# Altium PCB NBP3 Altera MAX7000 MAX3000 PLCC Rev1.00.PcbDoc (part 1 of 2)
Units mm, origin at the board's own origin, x right, y up, seen from the top; angles counter-clockwise.
Board outline 69 x 80.99 mm, 2 copper layers (Top Layer, Bottom Layer); 33 components, 75 nets, 412 pads, 171 vias.
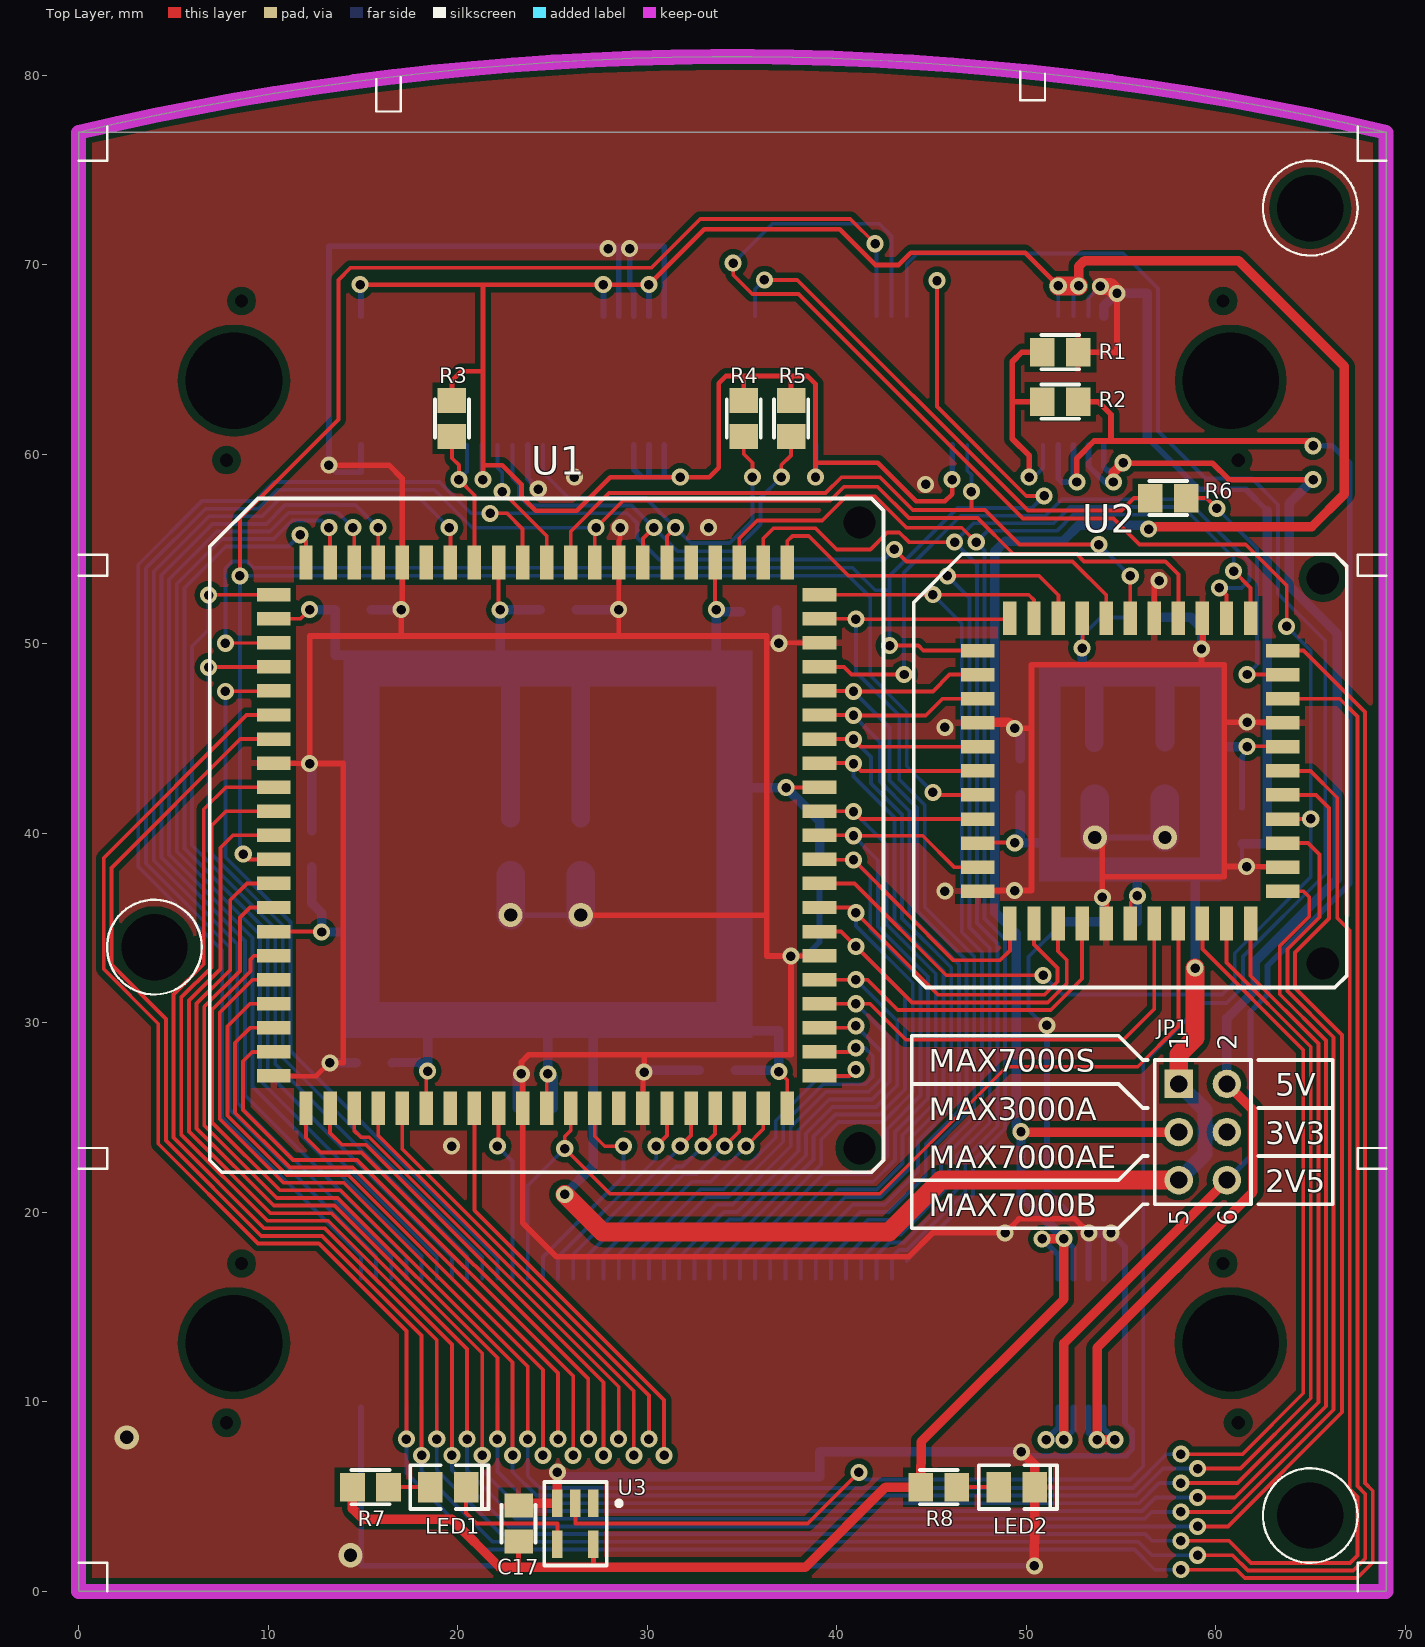
[diagram p0: Top Layer view]
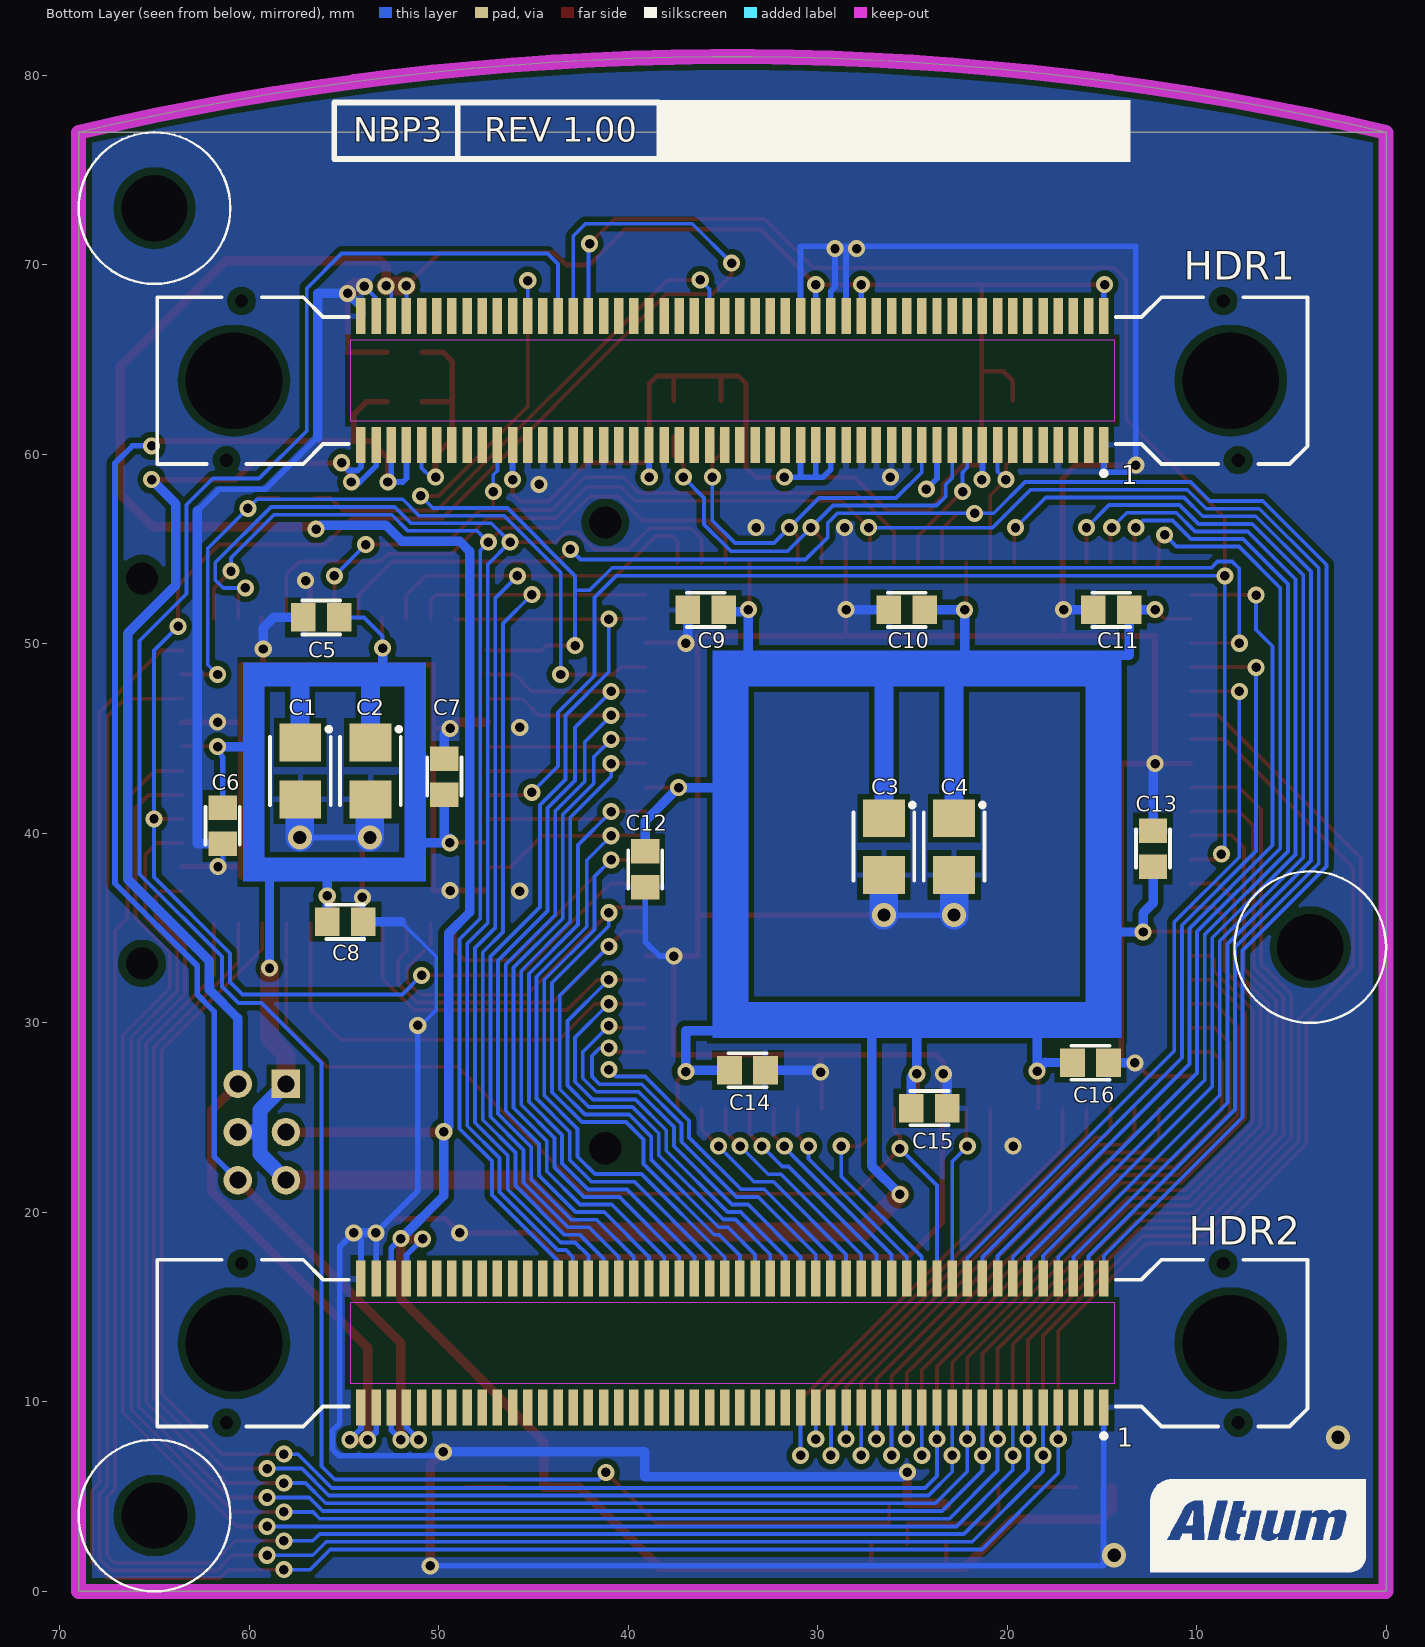
[diagram p1: Bottom Layer view, seen from below]

## Layer stack, top to bottom
Top Layer: signal copper 0.0356
Dielectric: core 0.32, FR-4, Dk 4.8
Bottom Layer: signal copper 0.0356

## Board outline
0,0 0,77 ccw(c0.001,77) 0.001,77 cw(c34.5,-69.801) 0.001,77 69,77 69,0

## Design rules (kind name [scope] priority, off if disabled: settings)
Clearance Clearance_Unplated_Pads [PadIsPlated = 'False'] p1: gap=0.4 // Slightly larger clearance around unplated holes
Clearance Clearance_Polygons [InPolygon] p2: gap=0.3
Clearance [All] p3: gap=0.2
ComponentClearance [All] p1: gap=0.2 collisioncheckmode=3 verticalgap=0.254 showdistances=FALSE
FabricationTestPointUsage TestPointUsage [All] p1 off: valid=0 allowmultiple=FALSE
FabricationTestpoint Testpoint [All] p1 off: side=3 testpointundercomponent=TRUE minsize=1.016 maxsize=2.54 preferedsize=1.524 minholesize=0 maxholesize=1.016 preferedholesize=0.813 testpointgrid=0.025 allowsidetop=TRUE allowsidebottom=TRUE usegrid=TRUE gridtolerance=0
HoleSize [All] p1: absolutevalues=TRUE maxlimit=5.2 minlimit=0.4 maxpercent=80.000 minpercent=20.000
PlaneClearance [All] p1: clearance=0.5
PlaneConnect [All] p1: planeconnectstyle=Relief reliefexpansion=0.5 reliefentries=4 reliefconductorwidth=0.25 reliefairgap=0.25
PolygonConnect PolygonConnect_Satellite_ID_Pads [InPadClass('Satellite ID Pads')] p1: connectstyle=NoConnect reliefconductorwidth=0.254 reliefentries=4 polygonreliefangle="90 Angle"
PolygonConnect [All] p2: connectstyle=Relief reliefconductorwidth=0.3 reliefentries=4 polygonreliefangle="90 Angle"
RoutingVias [All] p1: holewidth=0.5 width=0.9 viastyle="Through Hole" minholewidth=0.5 minwidth=0.9 maxholewidth=0.7 maxwidth=1.27
SMDNeckDown [All] p1: percent=100.000
SilkscreenOverComponentPads [All] p1: minsilkscreentomaskgap=0.254
SolderMaskExpansion SolderMaskExpansion_Vias [Isvia] p1: expansion=-0.65
SolderMaskExpansion [All] p2: expansion=0.1
Width Width_Power_Nets [InNetClass('Power Nets')] p1: maxlimit=2.5 minlimit=0.15 preferedwidth=0.25
Width [All] p2: maxlimit=1.5 minlimit=0.2 preferedwidth=0.2
21 further rules are at their usual default settings.

## Classes and differential pairs
pad class "Satellite ID Pads": HDR1-36 HDR1-38 HDR2-42
net class "Power Nets": 5V GND VCC VCC_FPGA VCCINT

## Components (designator, comment, footprint, x,y, rotation, side; value= is the part's Value field where it differs from the comment)
C1 "10uF" MCCT-B 57.3,43.3 r270 bottom
C2 "10uF" MCCT-B 53.6,43.3 r270 bottom
C3 "10uF" MCCT-B 26.5,39.3 r270 bottom
C4 "10uF" MCCT-B 22.8,39.3 r270 bottom
C5 "0.1uF" CC2012-0805#1 56.2,51.4 r0 bottom
C6 "0.1uF" CC2012-0805#1 61.4,40.4 r270 bottom
C7 "0.1uF" CC2012-0805#1 49.7,43 r90 bottom
C8 "0.1uF" CC2012-0805#1 54.928,35.334 r180 bottom
C9 "0.1uF" CC2012-0805#1 35.9,51.8 r180 bottom
C10 "0.1uF" CC2012-0805#1 25.3,51.8 r180 bottom
C11 "0.1uF" CC2012-0805#1 14.5,51.8 r180 bottom
C12 "0.1uF" CC2012-0805#1 39.1,38.1 r270 bottom
C13 "0.1uF" CC2012-0805#1 12.3,39.2 r270 bottom
C14 "0.1uF" CC2012-0805#1 33.7,27.5 r180 bottom
C15 "0.1uF" CC2012-0805#1 24.1,25.5 r180 bottom
C16 "0.1uF" CC2012-0805#1 15.6,27.9 r180 bottom
C17 "0.1uF" CC2012-0805#2 23.217,3.571 r90 top
HDR1 "54075-1009" 54075 34.5,63.9 r0 bottom locked
HDR2 "54075-1009" 54075 34.5,13.1 r0 bottom locked
JP1 "Header 3X2" HDR2X3 58.06,26.78 r270 top
LED1 "HSMG-C170" "SMD _LED" 19.5,5.5 r180 top locked
LED2 "HSMH-C170" "SMD _LED" 49.5,5.5 r180 top locked
R1 "680R" CC2012-0805#1 51.8,65.4 r0 top
R2 "82R" CC2012-0805#1 51.8,62.787 r180 top
R3 "4K7" CC2012-0805#1 19.7,61.9 r270 top
R4 "4K7" CC2012-0805#1 35.1,61.9 r270 top
R5 "4K7" CC2012-0805#1 37.6,61.9 r270 top
R6 "100R" CC2012-0805#1 57.5,57.7 r0 top
R7 "270R" CC2012-0805#1 15.4,5.5 r0 top
R8 "270R" CC2012-0805#1 45.4,5.5 r0 top
U1 "PLCC84 SM Socket" PLCC84_SKT_SM 24.7,39.9 r0 top
U2 "PLCC44 SM Socket" PLCC44_SKT_SM 55.5,43.3 r0 top
U3 "SN74LVC1G04DBV" SO-G5/P.95 26.217,3.571 r180 top

## Footprints (in the part's own frame and the unit in brackets; to place one, negate y for a bottom-side part, rotate by r counter-clockwise, add the part's x,y. Pads: shape width x height; smd on the part's side, far side on the other; paste and mask are expansions set on the pad)
54075 [mm] "Connector; Docking Station, Receptacle; 100 Position; Vertical"
  rect 0.5x1.9 smd: 1(-19.6,3.4) 2(-19.6,-3.4) 3(-18.8,3.4) 4(-18.8,-3.4) 5(-18,3.4) 6(-18,-3.4) 7(-17.2,3.4) 8(-17.2,-3.4) 9(-16.4,3.4) 10(-16.4,-3.4) 11(-15.6,3.4) 12(-15.6,-3.4) 13(-14.8,3.4) 14(-14.8,-3.4) 15(-14,3.4) 16(-14,-3.4) 17(-13.2,3.4) 18(-13.2,-3.4) 19(-12.4,3.4) 20(-12.4,-3.4) 21(-11.6,3.4) 22(-11.6,-3.4) 23(-10.8,3.4) 24(-10.8,-3.4) 25(-10,3.4) 26(-10,-3.4) 27(-9.2,3.4) 28(-9.2,-3.4) 29(-8.4,3.4) 30(-8.4,-3.4) 31(-7.6,3.4) 32(-7.6,-3.4) 33(-6.8,3.4) 34(-6.8,-3.4) 35(-6,3.4) 36(-6,-3.4) 37(-5.2,3.4) 38(-5.2,-3.4) 39(-4.4,3.4) 40(-4.4,-3.4) 41(-3.6,3.4) 42(-3.6,-3.4) 43(-2.8,3.4) 44(-2.8,-3.4) 45(-2,3.4) 46(-2,-3.4) 47(-1.2,3.4) 48(-1.2,-3.4) 49(-0.4,3.4) 50(-0.4,-3.4) 51(0.4,3.4) 52(0.4,-3.4) 53(1.2,3.4) 54(1.2,-3.4) 55(2,3.4) 56(2,-3.4) 57(2.8,3.4) 58(2.8,-3.4) 59(3.6,3.4) 60(3.6,-3.4) 61(4.4,3.4) 62(4.4,-3.4) 63(5.2,3.4) 64(5.2,-3.4) 65(6,3.4) 66(6,-3.4) 67(6.8,3.4) 68(6.8,-3.4) 69(7.6,3.4) 70(7.6,-3.4) 71(8.4,3.4) 72(8.4,-3.4) 73(9.2,3.4) 74(9.2,-3.4) 75(10,3.4) 76(10,-3.4) 77(10.8,3.4) 78(10.8,-3.4) 79(11.6,3.4) 80(11.6,-3.4) 81(12.4,3.4) 82(12.4,-3.4) 83(13.2,3.4) 84(13.2,-3.4) 85(14,3.4) 86(14,-3.4) 87(14.8,3.4) 88(14.8,-3.4) 89(15.6,3.4) 90(15.6,-3.4) 91(16.4,3.4) 92(16.4,-3.4) 93(17.2,3.4) 94(17.2,-3.4) 95(18,3.4) 96(18,-3.4) 97(18.8,3.4) 98(18.8,-3.4) 99(19.6,3.4) 100(19.6,-3.4)
  round 0.5 hole 0.7 unplated: MH1(-26.7,4.2) MH2(-25.9,-4.2) MH3(26.7,4.2) MH4(25.9,-4.2)
  round 4.8 hole 5.1 unplated: MH5(-26.3,0) MH6(26.3,0)
  Top Layer keep-out region: -20.15,2.15 20.15,2.15 20.15,-2.15 -20.15,-2.15
  silkscreen extent -30.35,-4.4 30.35,5.02
CC2012-0805#1 [mm]
  rect 1.3x1.5 smd: 1(-0.95,0) 2(0.95,0)
  silkscreen extent -1,-0.9 1,0.9
CC2012-0805#2 [mm]
  rect 1.271x1.5 smd: 1(-0.95,0) 2(0.95,0)
  silkscreen extent -1,-0.9 1,0.9
HDR2X3 [mm] "Connector; Header; 3x2 Position"
  rect 1.5x1.5 hole 0.9: 1(0,0)
  round 1.5 hole 0.9: 2(0,2.54) 3(2.54,0) 4(2.54,2.54) 5(5.08,0) 6(5.08,2.54)
  silkscreen extent -1.27,-1.27 6.35,3.81
MCCT-B [mm]
  rect 2x2.2 smd: 1(-1.5,0) 2(1.5,0)
  silkscreen extent -2.3,-1.6 1.8,1.6
PLCC44_SKT_SM [mm] "Socket, PLCC44, surface mount"
  rect 0.71x1.78 smd: 1(0,8.05) 2(-1.27,8.05) 3(-2.54,8.05) 4(-3.81,8.05) 5(-5.08,8.05) 6(-6.35,8.05) 18(-6.35,-8.05) 19(-5.08,-8.05) 20(-3.81,-8.05) 21(-2.54,-8.05) 22(-1.27,-8.05) 23(0,-8.05) 24(1.27,-8.05) 25(2.54,-8.05) 26(3.81,-8.05) 27(5.08,-8.05) 28(6.35,-8.05) 40(6.35,8.05) 41(5.08,8.05) 42(3.81,8.05) 43(2.54,8.05) 44(1.27,8.05)
  rect 1.78x0.71 smd: 7(-8.05,6.35) 8(-8.05,5.08) 9(-8.05,3.81) 10(-8.05,2.54) 11(-8.05,1.27) 12(-8.05,0) 13(-8.05,-1.27) 14(-8.05,-2.54) 15(-8.05,-3.81) 16(-8.05,-5.08) 17(-8.05,-6.35) 29(8.05,-6.35) 30(8.05,-5.08) 31(8.05,-3.81) 32(8.05,-2.54) 33(8.05,-1.27) 34(8.05,0) 35(8.05,1.27) 36(8.05,2.54) 37(8.05,3.81) 38(8.05,5.08) 39(8.05,6.35)
  round 1.4 hole 1.7 unplated: M1(10.16,10.16) M2(10.16,-10.16)
  silkscreen extent -11.43,-11.43 11.43,11.43
PLCC84_SKT_SM [mm] "Socket, PLCC84, surface mount"
  rect 0.71x1.78 smd: 1(0,14.4) 2(-1.27,14.4) 3(-2.54,14.4) 4(-3.81,14.4) 5(-5.08,14.4) 6(-6.35,14.4) 7(-7.62,14.4) 8(-8.89,14.4) 9(-10.16,14.4) 10(-11.43,14.4) 11(-12.7,14.4) 33(-12.7,-14.4) 34(-11.43,-14.4) 35(-10.16,-14.4) 36(-8.89,-14.4) 37(-7.62,-14.4) 38(-6.35,-14.4) 39(-5.08,-14.4) 40(-3.81,-14.4) 41(-2.54,-14.4) 42(-1.27,-14.4) 43(0,-14.4) 44(1.27,-14.4) 45(2.54,-14.4) 46(3.81,-14.4) 47(5.08,-14.4) 48(6.35,-14.4) 49(7.62,-14.4) 50(8.89,-14.4) 51(10.16,-14.4) 52(11.43,-14.4) 53(12.7,-14.4) 75(12.7,14.4) 76(11.43,14.4) 77(10.16,14.4) 78(8.89,14.4) 79(7.62,14.4) 80(6.35,14.4) 81(5.08,14.4) 82(3.81,14.4) 83(2.54,14.4) 84(1.27,14.4)
  rect 1.78x0.71 smd: 12(-14.4,12.7) 13(-14.4,11.43) 14(-14.4,10.16) 15(-14.4,8.89) 16(-14.4,7.62) 17(-14.4,6.35) 18(-14.4,5.08) 19(-14.4,3.81) 20(-14.4,2.54) 21(-14.4,1.27) 22(-14.4,0) 23(-14.4,-1.27) 24(-14.4,-2.54) 25(-14.4,-3.81) 26(-14.4,-5.08) 27(-14.4,-6.35) 28(-14.4,-7.62) 29(-14.4,-8.89) 30(-14.4,-10.16) 31(-14.4,-11.43) 32(-14.4,-12.7) 54(14.4,-12.7) 55(14.4,-11.43) 56(14.4,-10.16) 57(14.4,-8.89) 58(14.4,-7.62) 59(14.4,-6.35) 60(14.4,-5.08) 61(14.4,-3.81) 62(14.4,-2.54) 63(14.4,-1.27) 64(14.4,0) 65(14.4,1.27) 66(14.4,2.54) 67(14.4,3.81) 68(14.4,5.08) 69(14.4,6.35) 70(14.4,7.62) 71(14.4,8.89) 72(14.4,10.16) 73(14.4,11.43) 74(14.4,12.7)
  round 1.4 hole 1.7 unplated: M1(16.51,16.51) M2(16.51,-16.51)
  silkscreen extent -17.78,-17.78 17.78,17.78
"SMD _LED" [mm]
  rect 1.3x1.6 smd: 1(0.95,0) 2(-0.95,0)
  silkscreen extent -2.13,-1.15 2,1.15
SO-G5/P.95 [mm]
  rect 0.55x1.45 smd: 1(-0.95,-1.075) 2(0,-1.075) 3(0.95,-1.075) 4(0.95,1.075) 5(-0.95,1.075)
  silkscreen extent -2.43,-2.2 1.65,2.2

## Part data
C1 C2 C3 C4: library part CAP_POLAR, "Polar Capacitor"
C5 C6 C7 C8 C9 C10 C11 C12 C13 C14 C15 C16 C17: library part CAP, "Capacitor"
HDR1 HDR2: "Board-to-Board, Docking Station, 0.80mm (.031\") Pitch, Shielded Receptacle, Vertical, Ultra Low Profile, SMT"
JP1: "Header, 3-Pin, Dual row"
LED1 LED2: library part HSMX-C670, "Typical RED GaAs SMD LED Agilent make"
R1 R2 R3 R4 R5 R6 R7 R8: library part RES, "Resistor"
U1: library part EPM7160SLC84-10, "MAX 7000S 5V In-System Programmable CPLD, 160 Macrocells, 84-Pin PLCC, Speed Grade 10, Commercial Grade"
U2: library part EPM3032ALC44-10, "MAX 3032, 44-Pin PLCC, Speed Grade 10, Commercial Grade"
U3: library part SN74AHC1G04DBVR

## Free pads (board coordinates)
  round 3.2 hole 3.5 unplated: LP(4,34) LP(65,4) LP(65,73)

## Via types
v1: diameter 0.9, hole 0.5, Top Layer to Bottom Layer, 165 vias
v2: diameter 1.27, hole 0.7, Top Layer to Bottom Layer, 6 vias

## Nets (pads, with @x,y where several pads share a name; then routed paths per layer and width w, separated by ;. In a path a pad name is that pad's centre, name@x,y a point inside that pad or via, vN(x,y) a via of type N, cw(c..) or ccw(c..) an arc to the next point about the centre after c; other vN are vias at no path point)
5V: HDR1.97 HDR1.99 HDR2.97 HDR2.99 JP1.2 | length 84.1
  Top Layer w0.3: v1(55.118,59.563) 55.601,59.538 59.842,59.538 60.706,58.674 v1(65.151,58.674)
  Top Layer w0.5: v1(54.61,58.547) 54.61,59.055 v1(55.118,59.563) ; v1(54.686,8.001) v1(53.746,8.001) 53.746,12.852 61.976,21.082 61.976,25.404 JP1.2@60.6,26.78
  Bottom Layer w0.3: HDR1.97@53.3,60.5 53.3,59.4 54.178,58.522 v1(54.61,58.547) ; HDR1.99@54.1,60.5 54.1,59.336 54.28,59.157 54.762,59.157 v1(55.118,59.563) ; 54.1,8.587 HDR2.99@54.1,9.7 54.1,8.587 ; 54.1,8.587 v1(54.686,8.001) 54.1,8.587 ; 53.3,8.371 v1(53.746,8.001) 53.3,8.447 HDR2.97@53.3,9.7 53.3,8.371
  Bottom Layer w0.5: JP1.2@60.6,26.78 60.6,30.247 62.103,31.75 62.103,33.274 66.421,37.592 66.421,50.546 63.881,53.086 63.881,57.404 v1(65.151,58.674)
BOC_RX: HDR1.19 U1.1 | length 7.3
  Top Layer w0.2: v1(22.352,58.039) 24.7,55.691 U1.1@24.7,54.3
  Bottom Layer w0.2: HDR1.19@22.1,60.5 22.1,59.307 22.352,59.055 v1(22.352,58.039)
BOC_TX: HDR1.15 R3.2 U1.4 | length 9.1
  Top Layer w0.2: R3.2@19.7,60.95 19.7,59.802 20.066,59.436 v1(20.066,58.674) 20.89,57.85 U1.4@20.89,54.3
  Bottom Layer w0.2: v1(20.066,58.674) 20.5,59.108 HDR1.15@20.5,60.5
BUZZER: HDR2.24 U1.44 U2.25 | length 52.4
  Top Layer w0.2: U1.44@25.97,25.5 25.97,24.319 25.654,24.003 v1(25.654,23.368) 28.034,20.988 42.282,20.988 48.98,27.686 55.895,27.686 58.04,29.831 U2.25@58.04,35.25
  Bottom Layer w0.2: HDR2.24@23.7,16.5 23.7,21.414 v1(25.654,23.368)
FPGA_CLK: HDR2.2 U1.2 U2.2 | length 103.8
  Top Layer w0.2: v1(21.717,56.896) 22.606,56.896 23.43,56.072 U1.2@23.43,54.3 ; v1(43.053,54.991) 43.688,54.356 52.451,54.356 54.23,52.577 U2.2@54.23,51.35
  Bottom Layer w0.2: HDR2.2@14.9,16.5 14.9,17.7 7.575,25.025 7.575,33.827 3.15,38.252 3.15,54.178 6.508,57.537 9.302,57.537 10.312,58.547 19.05,58.547 20.701,56.896 28.956,56.896 29.464,56.388 29.464,55.626 30.632,54.458 42.52,54.458 v1(43.053,54.991)
FPGA_DONE: HDR1.74 U3.2 | length 121.5
  Top Layer w0.2: U3.2@26.217,4.646 26.217,3.581 38.481,3.581 v1(41.173,6.274)
  Bottom Layer w0.2: v1(41.173,6.274) 41.542,5.905 55.486,5.905 56.185,6.604 56.185,27.889 59.345,31.05 60.572,31.05 61.443,31.921 61.443,33.503 65.786,37.846 65.786,50.165 63.304,52.647 63.304,57.346 61.923,58.727 59.476,58.727 56.963,61.239 56.963,68.767 55.126,70.604 44.255,70.604 43.7,70.049 HDR1.74@43.7,67.3
FPGA_TCK: HDR1.72 U1.62 U2.32 | length 99.5
  Top Layer w0.2: v1(34.544,70.104) 34.544,69.469 35.55,68.463 37.986,68.463 49.832,56.617 54.61,56.617 55.982,55.245 61.595,55.245 63.754,53.086 v1(63.754,50.927) ; U1.62@39.1,37.36 40.945,37.36 45.793,32.512 v1(50.902,32.512) ; U2.32@63.55,40.763 v1(65.024,40.767)
  Bottom Layer w0.2: v1(34.544,70.104) 36.614,72.174 42.253,72.174 42.9,71.527 HDR1.72@42.9,67.3 ; v1(50.902,32.512) 51.91,31.504 60.358,31.504 61.011,32.156 61.011,33.68 65.024,37.694 65.024,49.657 v1(63.754,50.927)
FPGA_TDI: HDR1.78 U1.14 U2.7 | length 76.8
  Top Layer w0.2: v1(7.747,50.038) U1.14@10.3,50.06 ; v1(42.799,49.911) 44.316,49.911 44.577,49.65 U2.7@47.45,49.65 ; v1(45.3,69.176) 45.3,62.523 50.013,57.81 v1(50.952,57.81) ; U2.7@47.45,49.684 U2.7@47.478,49.684
  Bottom Layer w0.2: v1(7.747,50.038) 7.747,53.975 8.128,54.356 8.89,54.356 9.22,54.026 40.843,54.026 42.037,52.832 42.799,52.832 ; v1(42.799,49.911) 42.799,53.594 46.374,57.169 50.311,57.169 v1(50.952,57.81) ; HDR1.78@45.3,67.3 v1(45.3,69.176)
FPGA_TDO: HDR1.54 R6.1 | length 27.8
  Top Layer w0.2: v1(36.195,69.215) 37.926,69.215 50.104,57.038 55.042,57.038 55.704,57.7 R6.1@56.55,57.7
  Bottom Layer w0.2: HDR1.54@35.7,67.3 35.7,68.72 v1(36.195,69.215)
FPGA_TDO#: R6.2 U1.71 U2.38 | length 41.9
  Top Layer w0.2: U1.71@39.1,48.79 40.386,48.79 40.789,48.387 v1(43.561,48.387) ; R6.2@58.45,57.7 59.521,57.7 v1(60.071,57.15) ; v1(61.671,48.387) 61.983,48.38 U2.38@63.55,48.38 ; U2.38@63.549,48.414 U2.38@63.578,48.414
  Bottom Layer w0.2: v1(43.561,48.387) 43.561,53.772 46.558,56.769 51.035,56.769 51.899,57.633 59.588,57.633 62.188,55.033 62.188,48.904 v1(61.671,48.387)
FPGA_TMS: HDR1.70 U1.23 U2.13 | length 116.1
  Top Layer w0.2: v1(8.509,53.594) 8.509,56.642 13.716,61.849 13.716,69.215 14.351,69.85 30.226,69.85 32.809,72.433 40.724,72.433 v1(42.037,71.12) ; v1(8.687,38.913) 8.97,38.63 U1.23@10.3,38.63 ; v1(45.085,42.164) 45.473,42.03 U2.13@47.45,42.03
  Bottom Layer w0.2: v1(8.687,38.913) 8.509,39.091 v1(8.509,53.594) 40.64,53.594 41.783,52.451 41.783,48.318 43.707,46.394 43.707,43.542 v1(45.085,42.164) v1@45.085,42.167 ; v1(42.037,71.12) 42.1,71.057 HDR1.70@42.1,67.3
GND: C1.2 C2.2 C3.2 C4.2 C5.2 C6.2 C7.2 C8.2 C9.1 C10.1 C11.1 C12.2 C13.1 C14.2 C15.2 C16.2 C17.2 HDR1.1 HDR1.7 HDR1.23 HDR1.27 HDR1.29 HDR1.31 HDR1.33 HDR1.35 HDR1.36 HDR1.38 HDR1.42 HDR1.59 HDR1.63 HDR1.65 HDR1.67 HDR1.69 HDR1.71 HDR1.73 HDR1.75 HDR1.77 HDR1.98 HDR1.100 HDR2.1 HDR2.98 HDR2.100 LED2.2 R1.2 U1.7 U1.19 U1.32 U1.42 U1.47 U1.59 U1.72 U1.82 U2.10 U2.17 U2.22 U2.30 U2.36 U2.42 U2.44 U3.3 | length 489.5
  Top Layer w0.25: U1.32@10.3,27.2 10.322,27.178 12.55,27.203 v1(13.259,27.889) ; U1.19@10.3,43.71 10.322,43.688 v1(12.192,43.688) ; U1.42@23.43,25.5 23.43,26.649 ; 28.51,50.419 28.51,55.434 28.575,55.499 v1(28.575,56.134) ; U1.47@29.78,25.5 v1@29.78,27.335 ; 36.322,50.038 v1(36.957,50.038) ; v1@36.979,50.06 U1.72@39.1,50.06 ; v1(37.592,33.528) 39.078,33.528 U1.59@39.1,33.55 ; v1(54.026,36.627) 54.258,36.395 U2.22@54.258,35.284 ; v1(61.646,38.252) 63.55,38.254 U2.30@63.578,38.254
  Top Layer w0.3: v1(13.208,59.436) 16.383,59.436 17.08,58.739 U1.7@17.08,54.3 17.08,51.878 v1(17.018,51.816) 17.018,50.419 ; v1(13.259,27.889) 13.97,27.889 13.97,43.688 v1(12.192,43.688) 12.192,50.419 17.018,50.419 ; v2(26.5,35.689) 36.322,35.689 ; v1(29.845,27.4) 29.845,28.321 ; U2.17@47.478,36.984 50.292,36.984 50.292,48.895 60.452,48.895 60.452,37.719 54.026,37.719 ; v1(49.4,45.545) 50.292,45.545 ; R1.2@52.75,65.4 54.8,65.4 v1(54.8,68.5) ; v1(53.315,18.923) 52.578,19.66 49.632,19.66 v1(48.895,18.923) 45.072,18.923 43.802,17.653 25.233,17.653 23.43,19.456 U1.42@23.43,25.5 23.43,27.243 v1(23.368,27.305) 23.368,27.94 23.749,28.321 29.845,28.321 ; v2(53.628,39.785) 54.026,39.785 v1(54.026,36.627) ; U2.44@56.77,51.35 56.77,53.087 v1(57.023,53.34) ; 59.259,48.895 v1(59.259,49.734) 59.338,49.813 U2.42@59.338,51.384 ; 60.452,38.252 v1(61.646,38.252) ; 60.452,45.872 v1(61.671,45.872) 63.55,45.874 U2.36@63.578,45.874 ; 17.018,50.419 36.322,50.419 36.322,50.038 36.322,33.528 v1(37.592,33.528) 37.592,28.321 29.845,28.321
  Top Layer w0.5: C17.2@23.217,4.521 23.342,4.646 U3.3@25.267,4.646 v1(25.267,6.294) ; U2.10@47.478,45.874 49.071,45.874 v1(49.4,45.545) ; v1(49.759,7.366) 50.45,6.675 50.45,3.652 v1(50.444,1.346)
  Top Layer w0.9: v1(53.925,68.875) 54.425,68.875 v1(54.8,68.5)
  Bottom Layer w0.2: v1(51.105,29.87) 50.942,29.87 50.129,30.683 50.129,33.492 51.971,35.334 ; HDR1.98@53.3,67.3 53.3,68.25 v1(53.925,68.875) ; C6.2@61.4,39.45 61.4,38.498 v1(61.646,38.252)
  Bottom Layer w0.25: C8.2@53.978,35.334 v1(54.026,36.627)
  Bottom Layer w0.3: HDR2.1@14.9,9.7 14.91,1.346 v1(50.444,1.346) ; HDR1.1@14.9,60.5 14.9,59.055 13.589,59.055 v1(13.208,59.436) 13.208,70.993 30.9,70.993 HDR1.42@30.9,67.3 ; v2(22.8,35.689) v2(26.5,35.689) ; HDR1.23@23.7,60.5 23.7,58.723 v1(24.257,58.166) ; HDR1.36@28.5,67.3 28.5,70.993 ; v1@29.083,70.993 29.083,68.834 29.3,68.617 HDR1.38@29.3,67.3 ; v1(37.592,33.528) 38.354,33.528 39.1,34.274 C12.2@39.1,37.15 ; v1(49.759,7.366) 49.962,7.163 55.27,7.163 55.6,7.492 55.6,8.484 55.22,8.865 55.22,18.186 v1(54.483,18.923) 54.1,18.54 HDR2.100@54.1,16.5 ; v1(51.105,29.87) 51.105,21.133 v1(53.315,18.923) 53.3,18.908 HDR2.98@53.3,16.5 ; v2(53.628,39.785) v2(57.328,39.785) ; 56.388,60.909 59.131,58.166 61.595,58.166 62.738,57.023
  Bottom Layer w0.5: v1(12.192,43.688) 12.3,43.58 C13.1@12.3,40.15 ; v1(13.259,27.889) C16.2@14.65,27.9 ; C11.1@15.45,51.8 v1@17.002,51.8 ; C15.2@23.15,25.5 v1@23.15,27.015 ; v1(25.267,6.294) 25.506,6.055 39.116,6.055 39.116,7.366 v1(49.759,7.366) ; C10.1@26.25,51.8 v1@28.5,51.8 ; v1(29.845,27.4) 29.945,27.5 C14.2@32.75,27.5 ; C9.1@36.85,51.8 36.85,50.145 v1(36.957,50.038) ; v1(49.4,45.545) 49.7,45.245 C7.2@49.7,43.95 ; 51.971,35.334 C8.2@53.978,35.334 ; v1(53.315,18.923) v1(54.483,18.923) ; HDR1.100@54.1,67.3 54.1,67.825 v1(54.8,68.5) 56.388,68.5 56.388,60.909 ; C5.2@57.15,51.4 58.709,51.4 59.259,50.85 v1(59.259,49.734) ; C6.2@61.4,39.45 62.738,39.45 62.738,57.023
  Bottom Layer w1.5: v2(22.8,35.689) C4.2@22.8,37.8 ; v2(26.5,35.689) C3.2@26.5,37.8 ; v2(53.628,39.785) C2.2@53.628,41.834 ; v2(57.328,39.785) C1.2@57.328,41.834
  other v1: 19.685,23.495 45.72,36.957 49.396,36.984 45.72,45.593 28.499,51.816 33.25,56.134 44.704,58.42 26.162,58.8 27.94,70.866 29.083,70.866
  other v2: 14.351,1.905 2.54,8.128
IO0: HDR2.7 U1.17 U2.39 | length 159.1
  Top Layer w0.2: U1.17@10.3,46.25 8.865,46.25 1.321,38.706 1.321,32.842 4.204,29.959 4.204,23.622 9.468,18.358 12.677,18.358 17.3,13.735 v1(17.3,8.029) ; v1(58.166,1.143) 61.099,1.143 61.542,0.7 67.477,0.7 68.3,1.523 68.3,5.31 67.894,5.716 67.894,46.406 64.65,49.65 U2.39@63.55,49.65
  Bottom Layer w0.2: HDR2.7@17.3,9.7 17.3,6.246 21.33,2.216 55.721,2.216 56.794,1.143 v1(58.166,1.143)
IO1: HDR2.9 U1.18 U2.37 | length 155.6
  Top Layer w0.2: U1.18@10.3,44.98 8.531,44.98 1.727,38.176 1.727,33.09 4.604,30.213 4.604,23.788 9.633,18.758 12.842,18.758 18.1,13.5 v1(18.1,7.173) ; v1(59.055,1.905) 60.902,1.905 61.707,1.1 67.267,1.1 67.9,1.733 67.9,5.144 67.488,5.556 67.488,46.177 66.555,47.11 U2.37@63.55,47.11
  Bottom Layer w0.2: HDR2.9@18.1,9.7 18.1,6.36 21.844,2.616 55.931,2.616 56.642,1.905 v1(59.055,1.905)
IO2: HDR2.11 U1.20 U2.34 | length 143.7
  Top Layer w0.2: U1.20@10.3,42.44 7.769,42.44 6.604,41.275 6.604,33.095 5.004,31.495 5.004,23.953 9.799,19.158 13.008,19.158 18.9,13.266 v1(18.9,8.029) ; v1(58.166,2.667) 60.706,2.667 61.873,1.5 67.101,1.5 67.5,1.899 67.5,4.978 67.081,5.397 67.081,34.874 66.421,35.535 66.421,41.885 65.006,43.3 U2.34@63.55,43.3
  Bottom Layer w0.2: HDR2.11@18.9,9.7 18.9,6.412 22.283,3.029 56.28,3.029 56.642,2.667 v1(58.166,2.667)
IO3: HDR2.13 U1.21 U2.33 | length 135.7
  Top Layer w0.2: U1.21@10.3,41.17 7.769,41.17 7.004,40.405 7.004,32.93 5.41,31.336 5.41,24.113 9.965,19.558 13.174,19.558 19.7,13.032 v1(19.7,7.173) ; v1(59.055,3.429) 60.655,3.429 66.675,9.449 66.675,29.359 64.192,31.842 64.192,33.712 65.996,35.516 65.996,41.345 65.31,42.03 U2.33@63.55,42.03
  Bottom Layer w0.2: HDR2.13@19.7,9.7 19.7,6.401 22.672,3.429 v1(59.055,3.429)
IO4: HDR2.15 U1.22 U2.31 | length 128.6
  Top Layer w0.2: U1.22@10.3,39.9 8.15,39.9 7.493,39.243 7.493,32.853 5.817,31.177 5.817,24.272 10.131,19.958 13.339,19.958 20.5,12.797 v1(20.5,8.029) ; v1(58.166,4.191) 60.833,4.191 66.229,9.587 66.229,29.24 63.792,31.676 63.792,33.889 65.481,35.578 65.481,38.888 64.879,39.49 U2.31@63.55,39.49
  Bottom Layer w0.2: HDR2.15@20.5,9.7 20.5,6.375 23.04,3.835 56.277,3.835 56.632,4.191 v1(58.166,4.191)
IO5: HDR2.17 U1.24 U2.29 | length 121.9
  Top Layer w0.2: U1.24@10.3,37.36 8.88,37.36 8.001,36.481 8.001,32.795 6.223,31.017 6.223,24.431 10.296,20.358 13.505,20.358 21.3,12.563 v1(21.3,7.173) ; v1(59.055,4.953) 61.011,4.953 65.829,9.771 65.829,29.074 63.392,31.511 63.392,34.055 64.948,35.611 64.948,36.652 64.65,36.95 U2.29@63.55,36.95
  Bottom Layer w0.2: HDR2.17@21.3,9.7 21.3,6.375 23.434,4.242 56.118,4.242 56.829,4.953 v1(59.055,4.953)
IO6: HDR2.19 U1.25 U2.28 | length 115
  Top Layer w0.2: U1.25@10.3,36.09 9.039,36.09 8.509,35.56 8.509,32.738 6.629,30.858 6.629,24.591 10.453,20.767 13.662,20.767 22.1,12.329 v1(22.1,8.029) ; v1(58.166,5.715) 61.163,5.715 65.429,9.981 65.429,28.908 61.85,32.487 U2.28@61.85,35.25
  Bottom Layer w0.2: HDR2.19@22.1,9.7 22.1,6.325 23.776,4.648 55.958,4.648 57.025,5.715 v1(58.166,5.715)
IO7: HDR2.21 U1.27 U2.27 | length 111.9
  Top Layer w0.2: U1.27@10.3,33.55 9.268,33.55 9.068,33.35 9.068,32.731 7.036,30.699 7.036,24.75 10.619,21.167 13.827,21.167 22.9,12.094 v1(22.9,7.173) ; v1(59.055,6.477) 61.316,6.477 65.029,10.19 65.029,28.743 60.58,33.191 U2.27@60.58,35.25
  Bottom Layer w0.2: HDR2.21@22.9,9.7 22.9,6.31 24.155,5.055 55.799,5.055 57.221,6.477 v1(59.055,6.477)
IO8: HDR2.23 U1.28 U2.26 | length 108.5
  Top Layer w0.2: U1.28@10.3,32.28 9.183,32.28 7.442,30.54 7.442,24.943 10.818,21.567 13.993,21.567 23.7,11.86 v1(23.7,8.029) ; v1(58.166,7.239) 61.417,7.239 64.629,10.451 64.629,28.577 59.31,33.896 U2.26@59.31,35.25
  Bottom Layer w0.2: HDR2.23@23.7,9.7 23.7,6.096 24.335,5.461 55.64,5.461 57.418,7.239 v1(58.166,7.239)
IO9: HDR2.25 U1.29 | length 36.9
  Top Layer w0.2: U1.29@10.3,31.01 9.039,31.01 7.849,29.82 7.849,25.102 10.984,21.967 14.228,21.967 24.5,11.695 v1(24.5,7.173)
  Bottom Layer w0.2: v1(24.5,7.173) HDR2.25@24.5,9.7
IO10: HDR2.27 U1.30 | length 34
  Top Layer w0.2: U1.30@10.3,29.74 9.039,29.74 8.255,28.956 8.255,25.261 11.149,22.367 14.463,22.367 25.3,11.53 v1(25.3,8.029)
  Bottom Layer w0.2: v1(25.3,8.029) HDR2.27@25.3,9.7
IO11: HDR2.29 U1.31 | length 34.4
  Top Layer w0.2: U1.31@10.3,28.47 9.166,28.47 8.673,27.977 8.673,25.409 11.315,22.767 14.698,22.767 26.1,11.365 v1(26.1,7.173)
  Bottom Layer w0.2: v1(26.1,7.173) HDR2.29@26.1,9.7
IO12: HDR2.31 U1.33 | length 26.6
  Top Layer w0.2: U1.33@12,25.5 12,23.941 12.774,23.167 14.933,23.167 26.9,11.2 v1(26.9,8.029)
  Bottom Layer w0.2: v1(26.9,8.029) HDR2.31@26.9,9.7
IO13: HDR2.33 U1.34 | length 27.6
  Top Layer w0.2: U1.34@13.27,25.5 13.27,24.195 13.898,23.567 15.168,23.567 27.7,11.035 v1(27.7,7.173)
  Bottom Layer w0.2: v1(27.7,7.173) HDR2.33@27.7,9.7
IO14: HDR2.35 U1.35 | length 25.2
  Top Layer w0.2: U1.35@14.54,25.5 14.54,24.322 14.895,23.967 15.334,23.967 28.5,10.801 v1(28.5,8.029)
  Bottom Layer w0.2: v1(28.5,8.029) HDR2.35@28.5,9.7
IO15: HDR2.37 U1.36 | length 26.4
  Top Layer w0.2: U1.36@15.81,25.5 15.81,24.056 29.3,10.566 v1(29.3,7.173)
  Bottom Layer w0.2: v1(29.3,7.173) HDR2.37@29.3,9.7
IO16: HDR2.39 U1.37 | length 24.5
  Top Layer w0.2: U1.37@17.08,25.5 17.08,23.352 30.1,10.332 v1(30.1,8.029)
  Bottom Layer w0.2: v1(30.1,8.029) HDR2.39@30.1,9.7
IO17: HDR2.41 U1.40 | length 25
  Top Layer w0.2: U1.40@20.89,25.5 20.89,20.108 30.9,10.098 v1(30.9,7.173)
  Bottom Layer w0.2: v1(30.9,7.173) HDR2.41@30.9,9.7
LCD_BCKL: HDR2.22 U1.41 | length 9.4
  Top Layer w0.2: v1(22.098,23.495) 22.16,23.557 U1.41@22.16,25.5
  Bottom Layer w0.2: v1(22.098,23.495) 22.9,22.693 HDR2.22@22.9,16.5
LCD_E: HDR2.26 U1.45 | length 12
  Top Layer w0.2: U1.45@27.24,25.5 27.24,24.017 27.762,23.495 v1(28.753,23.495)
  Bottom Layer w0.2: HDR2.26@24.5,16.5 24.5,17.642 28.753,21.895 v1(28.753,23.495)
LED0: HDR2.60 U1.68 U2.11 | length 43.4
  Top Layer w0.2: U1.68@39.1,44.98 40.872,44.98 41.282,44.57 U2.11@47.45,44.57
  Bottom Layer w0.2: HDR2.60@38.1,16.5 38.1,17.653 40.862,20.415 42.539,20.415 44.298,22.174 44.298,23.772 46.05,25.525 46.05,32.916 43.453,35.513 43.453,41.007 41.816,42.643 41.816,44.036 v1(40.894,44.958)
LED1: HDR2.62 U1.69 U2.9 | length 44.8
  Top Layer w0.2: U1.69@39.1,46.25 40.872,46.25 v1(40.894,46.228) 44.704,46.228 45.586,47.11 U2.9@47.45,47.11
  Bottom Layer w0.2: HDR2.62@38.9,16.5 38.9,17.653 41.262,20.015 42.774,20.015 44.704,21.946 44.704,23.613 46.457,25.366 46.457,33.075 43.853,35.679 43.853,41.172 42.291,42.734 42.291,44.831 v1(40.894,46.228)
LED2: HDR2.64 U1.70 U2.8 | length 45.9
  Top Layer w0.2: U1.70@39.1,47.52 v1@40.872,47.52 ; v1(40.894,47.498) 45.085,47.498 45.967,48.38 U2.8@47.45,48.38
  Bottom Layer w0.2: HDR2.64@39.7,16.5 39.7,17.653 41.662,19.615 42.983,19.615 45.11,21.742 45.11,23.454 46.863,25.206 46.863,33.299 44.253,35.909 44.253,41.338 42.799,42.792 42.799,45.593 v1(40.894,47.498)
LED3: HDR2.66 U1.73 U2.6 | length 51
  Top Layer w0.2: U1.73@39.1,51.33 40.999,51.33 v1(41.021,51.308) ; v1@41.063,51.35 v1(41.021,51.308) ; U2.6@49.15,51.35 49.108,51.308 v1(41.021,51.308)
  Bottom Layer w0.2: HDR2.66@40.5,16.5 40.5,17.653 42.062,19.215 43.168,19.215 45.517,21.565 45.517,23.294 47.269,25.047 47.269,33.503 44.653,36.119 44.653,41.504 43.307,42.85 43.307,46.228 41.021,48.514 v1(41.021,51.308)
LED4: HDR2.68 U1.74 U2.5 | length 52.7
  Top Layer w0.2: U1.74@39.1,52.6 50.143,52.6 50.42,52.323 U2.5@50.42,51.35
  Bottom Layer w0.2: HDR2.68@41.3,16.5 41.3,17.57 42.545,18.815 43.352,18.815 45.949,21.412 45.949,23.161 47.676,24.888 47.676,33.731 46.609,34.798 46.609,51.076 v1(45.085,52.6)
LED5: HDR2.70 U1.75 U2.4 | length 59
  Top Layer w0.2: U1.75@37.4,54.3 37.4,55.434 37.668,55.702 38.532,55.702 40.64,53.594 50.692,53.594 51.718,52.568 51.718,51.378 U2.4@51.69,51.35
  Bottom Layer w0.2: HDR2.70@42.1,16.5 42.1,17.716 42.799,18.415 43.555,18.415 46.355,21.216 46.355,23.001 48.082,24.728 48.082,33.96 47.009,35.033 47.009,52.432 v1(45.847,53.594)
LED6: HDR2.72 U1.76 U2.41 | length 77
  Top Layer w0.2: U1.76@36.13,54.3 36.13,55.561 36.678,56.109 38.887,56.109 40.005,54.991 41.783,54.991 42.672,55.88 43.307,55.88 43.815,55.372 v1(46.228,55.372) ; v1(60.198,52.959) 60.58,52.577 U2.41@60.58,51.35
  Bottom Layer w0.2: HDR2.72@42.926,16.5 42.926,17.653 43.288,18.015 43.72,18.015 46.787,21.082 46.787,22.867 48.489,24.569 48.489,34.188 47.409,35.268 47.409,54.191 v1(46.228,55.372) 47.225,56.369 51.46,56.369 52.317,57.226 58.852,57.226 61.788,54.29 61.788,53.381 61.366,52.959 v1(60.198,52.959)
LED7: HDR2.74 U1.77 U2.40 | length 75.1
  Top Layer w0.2: U1.77@34.86,54.3 34.86,55.561 35.814,56.515 39.243,56.515 40.513,57.785 42.037,57.785 43.688,56.134 46.609,56.134 v1(47.371,55.372) ; v1(60.96,53.848) 61.85,52.958 U2.40@61.85,51.35
  Bottom Layer w0.2: HDR2.74@43.7,17.43 47.193,20.923 47.193,22.708 48.895,24.41 48.895,34.417 47.809,35.503 47.809,54.934 v1(47.371,55.372) 47.968,55.969 51.626,55.969 52.476,56.82 58.693,56.82 60.96,54.552 v1(60.96,53.848)
NetLED1_1: LED1.1 R7.2 | length 2.2
  Top Layer w0.2: R7.2@16.35,5.5 LED1.1@18.55,5.5
NetLED1_2: LED1.2 U3.4 | length 7.5
  Top Layer w0.2: LED1.2@20.45,5.5 20.45,4.137 21.006,3.581 25.267,3.581 U3.4@25.267,2.496
NetLED2_1: LED2.1 R8.2 | length 2.2
  Top Layer w0.2: R8.2@46.35,5.5 LED2.1@48.55,5.5
RAM0_DATA0: HDR2.42 U1.56 | length 22.4
  Top Layer w0.2: U1.56@39.1,29.74 40.916,29.74 v1(41.021,29.845)
  Bottom Layer w0.2: HDR2.42@30.9,16.5 30.9,17.653 33.664,20.417 34.514,20.417 37.586,23.489 37.586,24.504 39.447,26.365 41.681,26.365 42.399,27.083 42.399,28.467 v1(41.021,29.845)
RAM0_DATA1: HDR2.40 U1.55 | length 21.7
  Top Layer w0.2: U1.55@39.1,28.47 40.84,28.47 v1(41.021,28.677)
  Bottom Layer w0.2: HDR2.40@30.1,16.5 30.1,17.78 33.137,20.817 34.279,20.817 37.186,23.724 37.186,24.669 39.282,26.765 41.51,26.765 41.91,27.165 41.91,28.27 41.529,28.651 v1(41.021,28.677)
RAM0_DATA2: HDR2.38 U1.54 | length 19.6
  Top Layer w0.2: U1.54@39.1,27.2 40.687,27.2 v1(41.021,27.534)
  Bottom Layer w0.2: HDR2.38@29.3,16.5 29.3,17.704 32.814,21.217 34.044,21.217 36.786,23.959 36.786,24.835 39.116,27.165 40.652,27.165 v1(41.021,27.534)
RAM0_DATA3: HDR2.36 U1.52 | length 12.8
  Top Layer w0.2: v1(35.23,23.495) 36.13,24.395 U1.52@36.13,25.5
  Bottom Layer w0.2: HDR2.36@28.5,16.5 28.5,17.78 32.337,21.617 33.352,21.617 v1(35.23,23.495)
RAM0_DATA4: HDR2.34 U1.51 | length 12.4
  Top Layer w0.2: v1(34.087,23.495) 34.86,24.268 U1.51@34.86,25.5
  Bottom Layer w0.2: HDR2.34@27.7,16.5 27.7,17.78 31.937,22.017 32.609,22.017 v1(34.087,23.495)
RAM0_DATA5: HDR2.32 U1.50 | length 12
  Top Layer w0.2: v1(32.944,23.495) 33.59,24.141 U1.50@33.59,25.5
  Bottom Layer w0.2: HDR2.32@26.9,16.5 26.9,17.78 31.537,22.417 31.866,22.417 v1(32.944,23.495)
RAM0_DATA6: HDR2.30 U1.49 | length 11.6
  Top Layer w0.2: v1(31.75,23.495) 32.32,24.065 U1.49@32.32,25.5
  Bottom Layer w0.2: HDR2.30@26.1,16.5 26.1,17.78 31.75,23.43 v1(31.75,23.495)
RAM0_DATA7: HDR2.28 U1.48 | length 11.4
  Top Layer w0.2: v1(30.48,23.495) 31.05,24.065 U1.48@31.05,25.5
  Bottom Layer w0.2: HDR2.28@25.3,16.5 25.3,17.653 30.48,22.833 v1(30.48,23.495)
RAM_ADDR0: HDR1.21 R5.2 U1.81 | length 24.8
  Top Layer w0.2: U1.81@29.78,54.3 29.78,55.561 v1(30.353,56.134) ; v1(37.084,58.801) 37.084,59.436 37.6,59.952 R5.2@37.6,60.95
  Bottom Layer w0.2: HDR1.21@22.9,60.5 22.9,58.761 23.241,58.42 23.241,57.785 23.724,57.302 29.185,57.302 31.598,54.889 34.569,54.889 35.992,56.312 35.992,57.709 v1(37.084,58.801)
RAM_ADDR1: HDR1.25 R4.2 U1.80 | length 21.2
  Top Layer w0.2: U1.80@31.05,54.3 31.05,55.688 v1(31.496,56.134) ; R4.2@35.1,60.95 35.1,60.023 35.56,59.563 v1(35.56,58.801)
  Bottom Layer w0.2: HDR1.25@24.5,60.5 24.5,59.066 25.857,57.709 29.921,57.709 32.309,55.321 34.366,55.321 35.56,56.515 v1(35.56,58.801)
REF_CLK: HDR2.4 U1.83 U2.43 | length 106.5
  Top Layer w0.2: U1.83@27.24,54.3 27.24,56.069 v1(27.305,56.134) 28.727,57.556 39.649,57.556 40.386,58.293 42.164,58.293 43.815,56.642 47.44,56.642 49.326,54.756 52.661,54.756 53.063,54.354 57.351,54.354 58.04,53.665 U2.43@58.04,51.35
  Bottom Layer w0.2: HDR2.4@15.7,16.5 15.7,17.7 7.975,25.425 7.975,33.993 3.556,38.412 3.556,54 6.693,57.137 9.487,57.137 10.49,58.141 18.764,58.141 20.77,56.134 v1(27.305,56.134)